# Altium PCB dev_26_pcb_design_1.PcbDoc
Units mil, origin at the board's own origin, x right, y up, seen from the top; angles counter-clockwise.
Board outline 4275 x 2380 mil, 4 copper layers (Top Layer, GND, 3V3, Bottom Layer 1), stack 23.756 mil thick; 68 components, 82 nets, 288 pads, 92 vias.
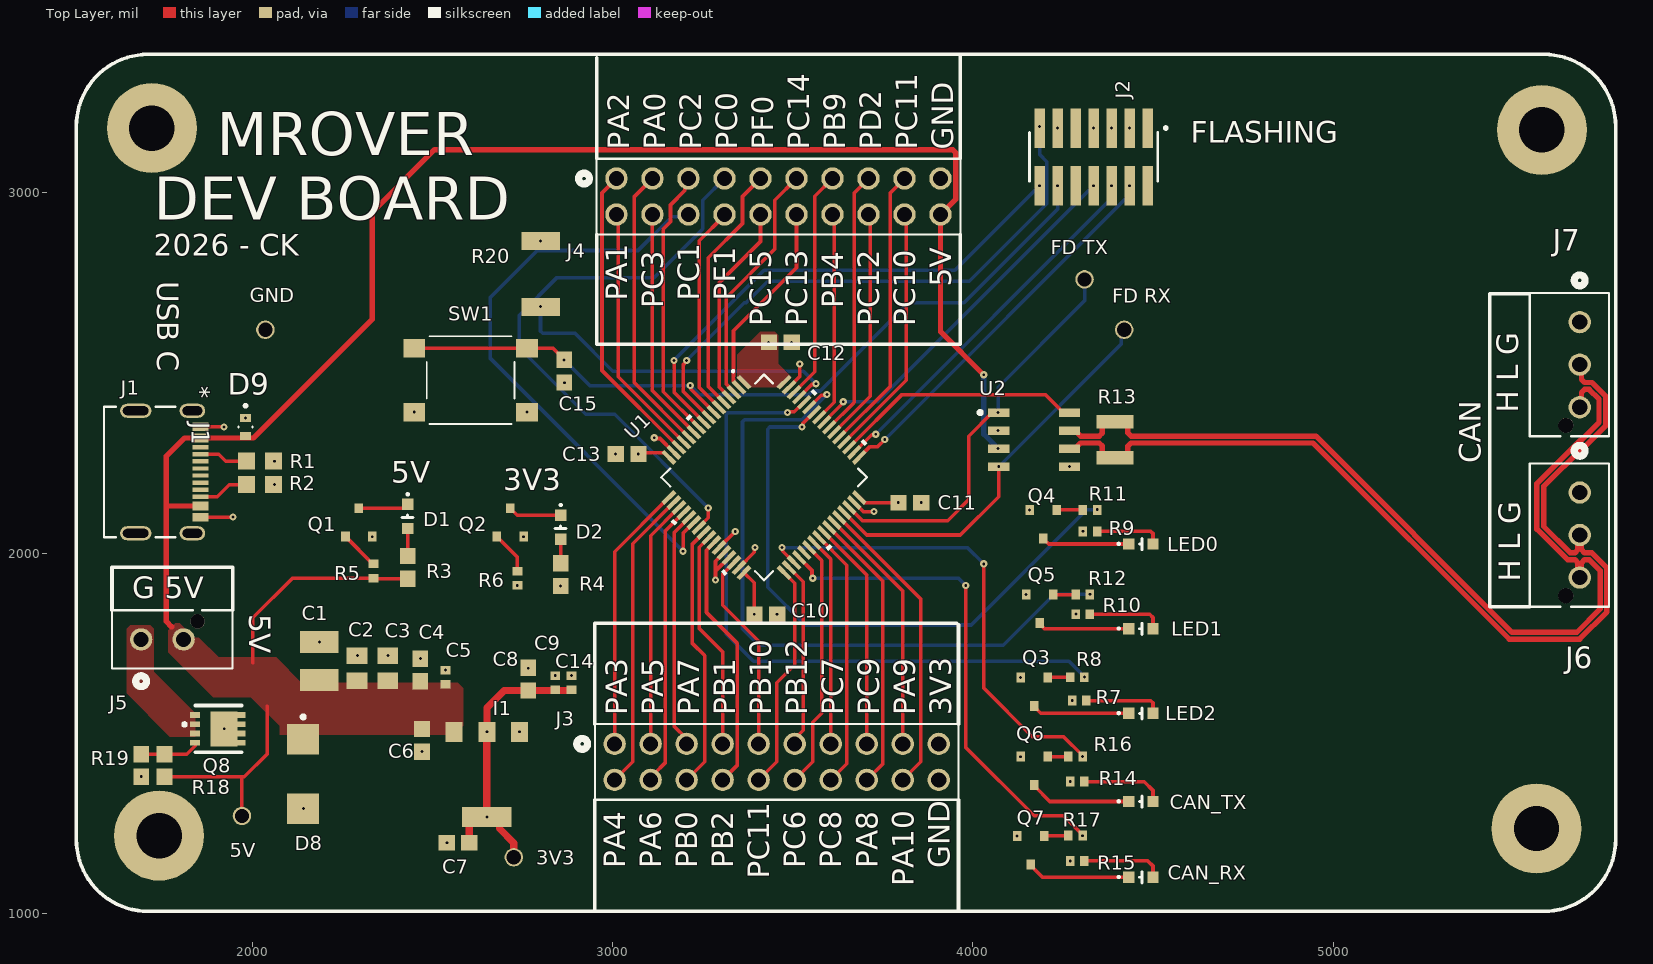
[diagram p0: Top Layer view]
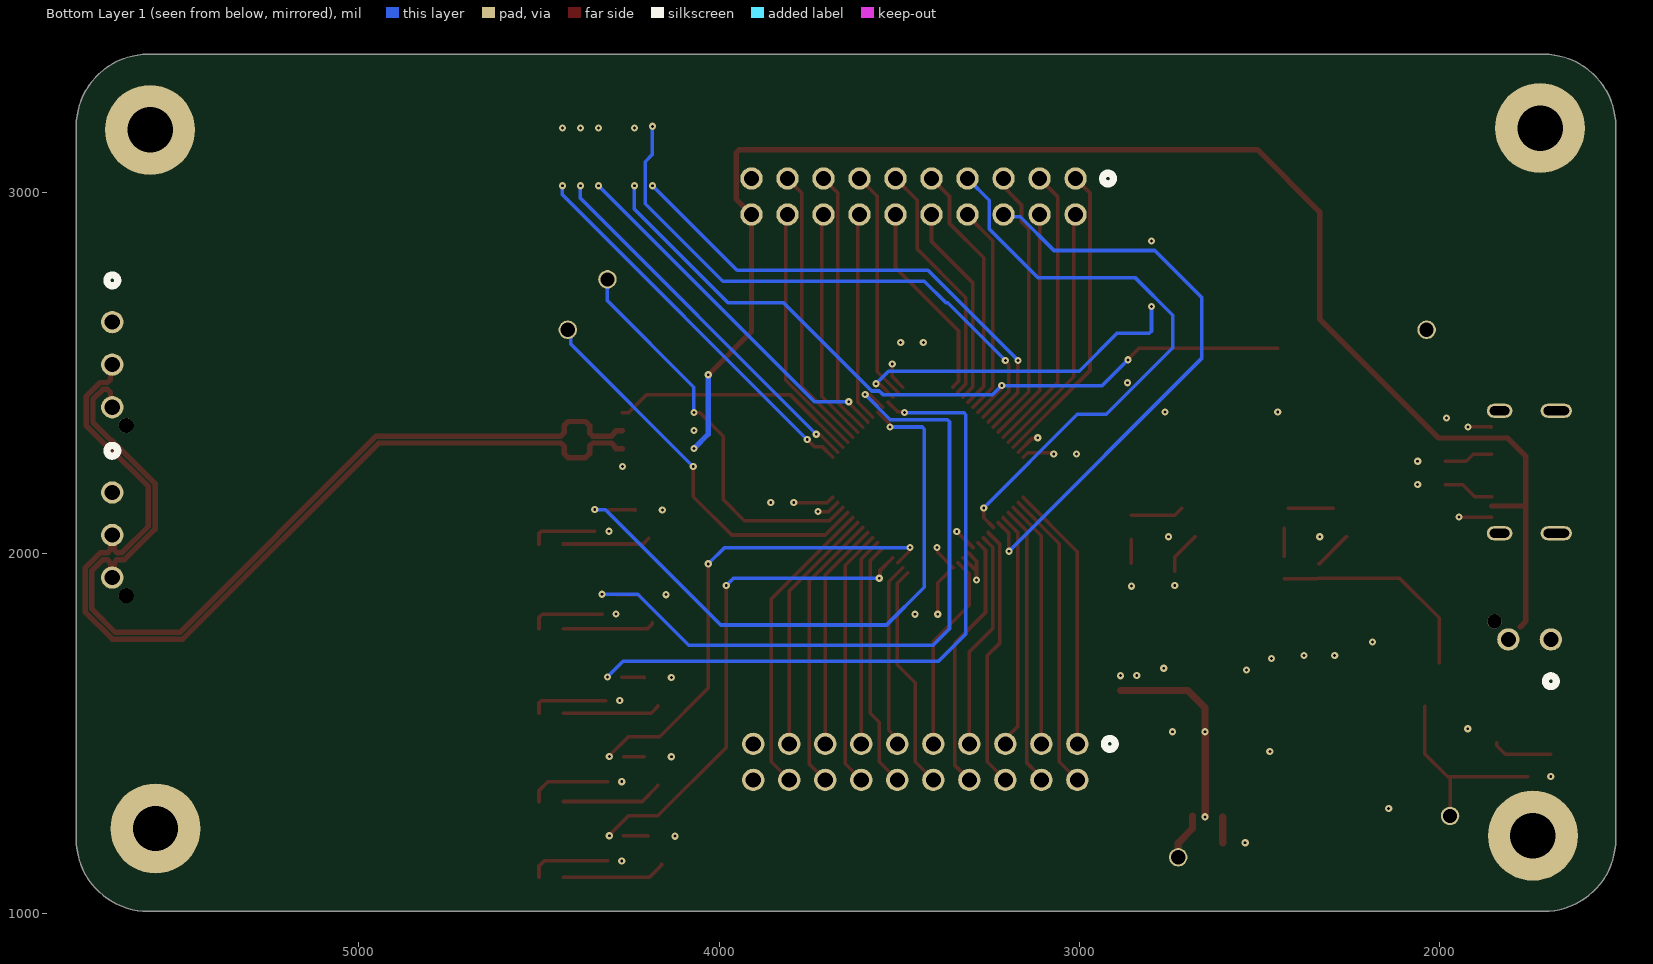
[diagram p1: Bottom Layer 1 view, seen from below]
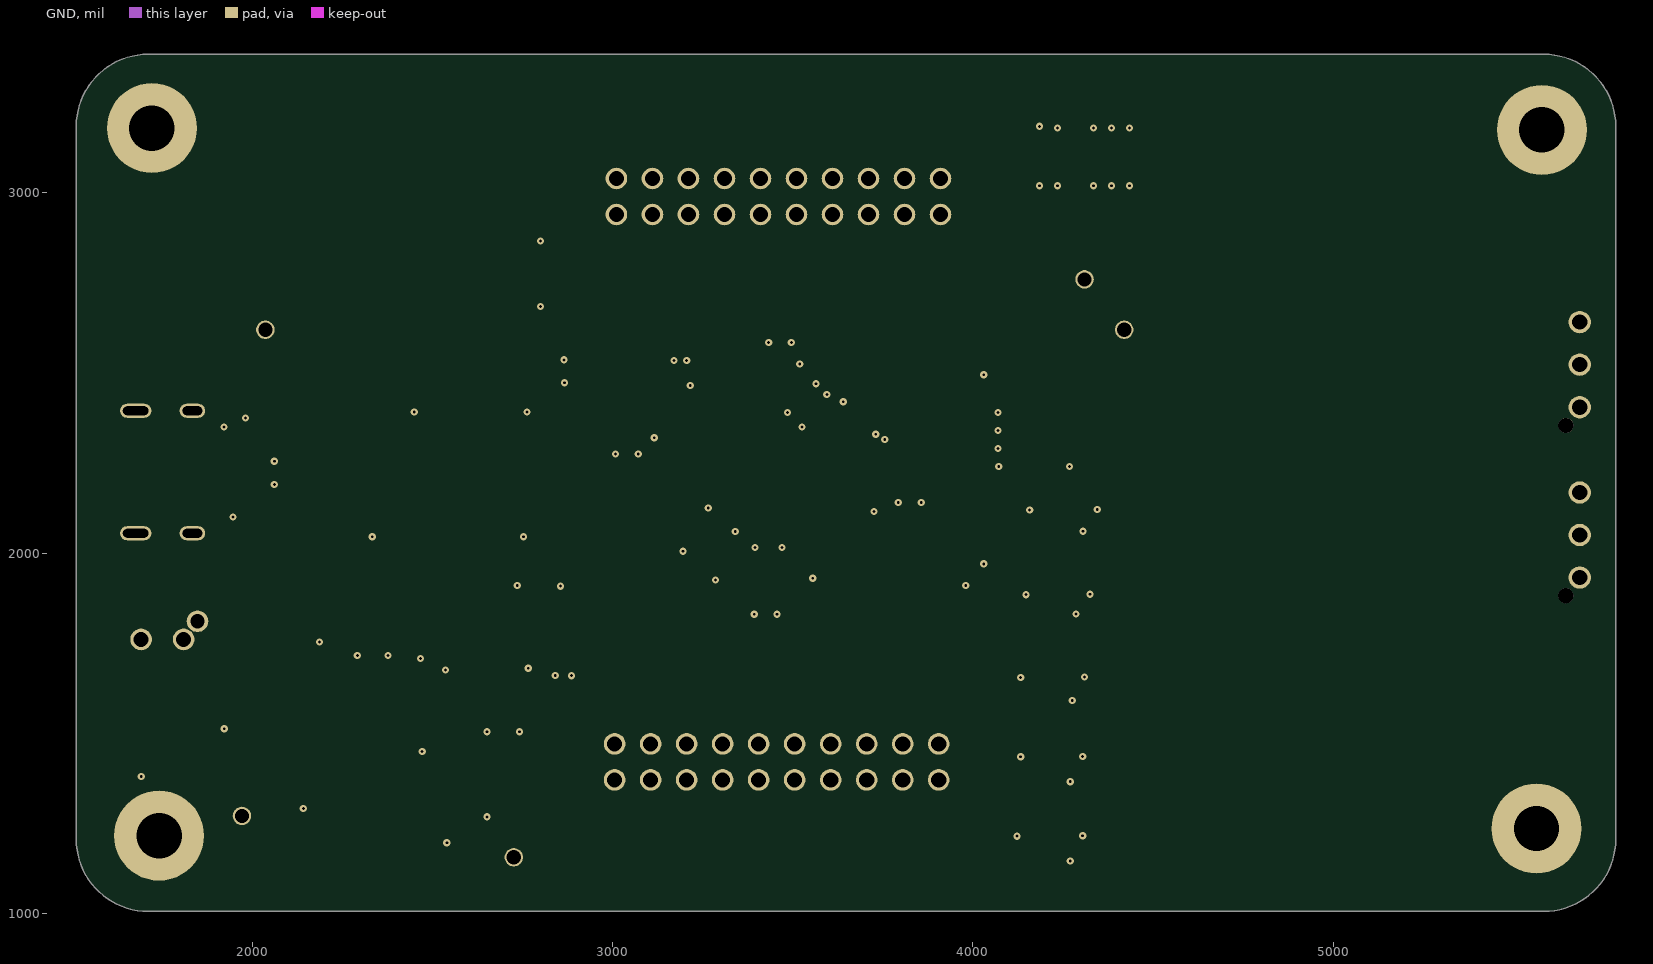
[diagram p2: GND]
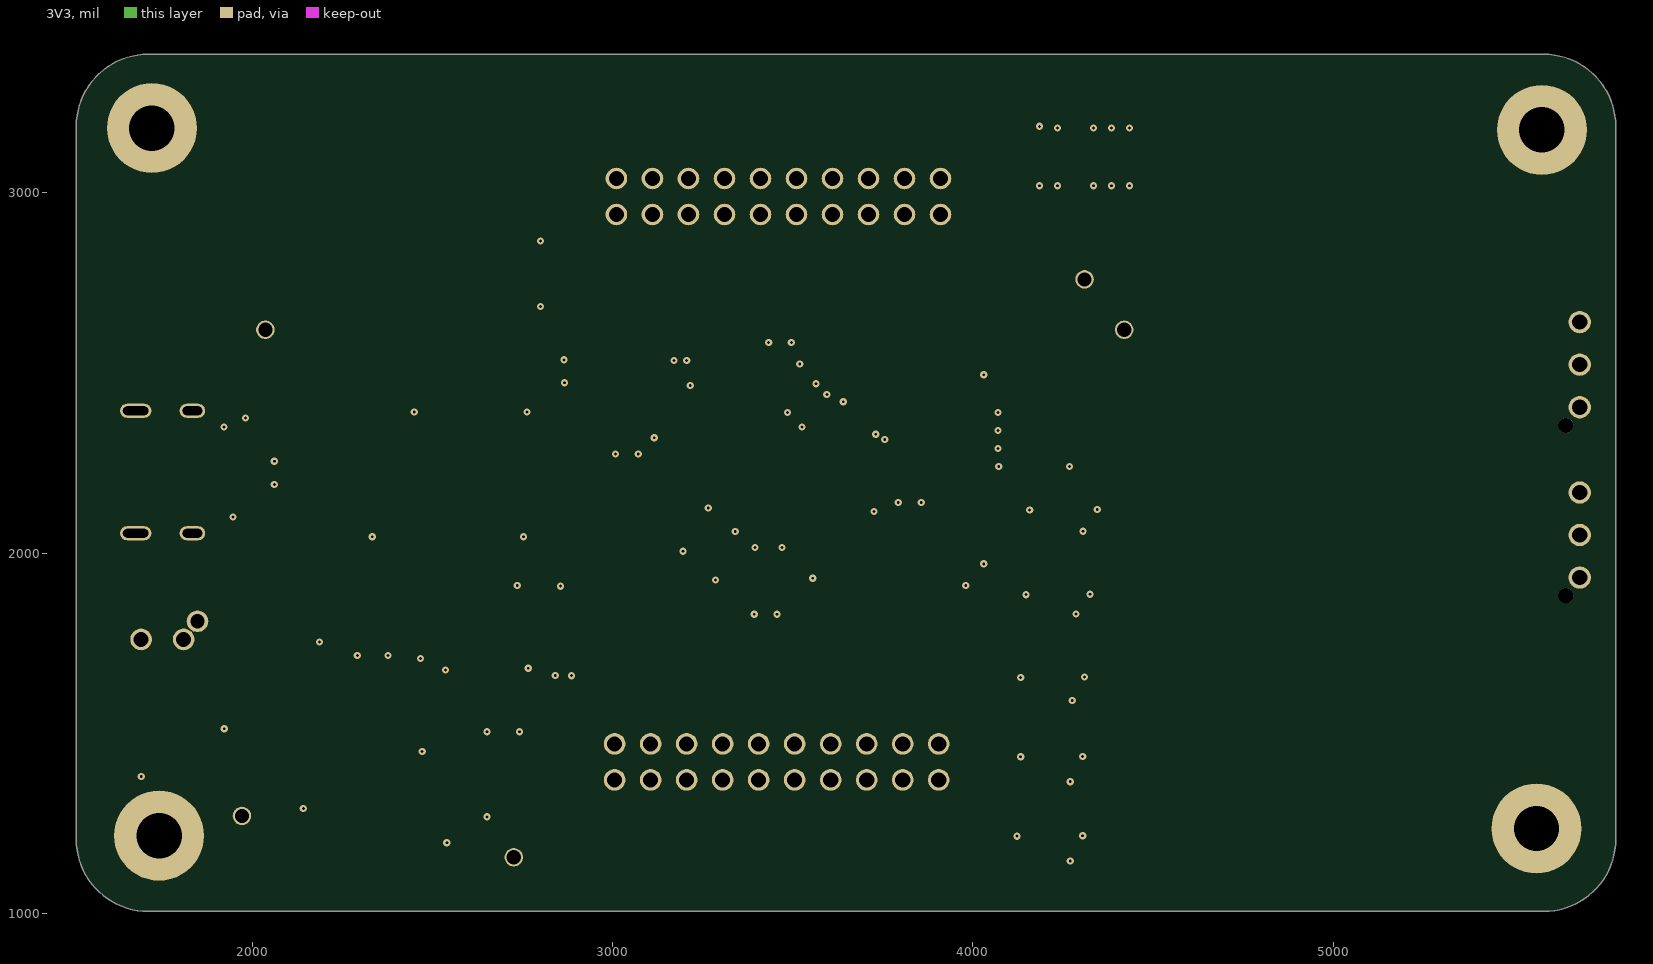
[diagram p3: 3V3]

## Layer stack, top to bottom
Top Solder: solder mask 0.4, Solder Resist, Dk 3.5
Top Layer: signal copper 1.378
Dielectric 2: prepreg 2.8, PP-006, Dk 4.1
GND: signal copper 1.4
Dielectric 1: dielectric 12.6, FR-4, Dk 4.8
3V3: signal copper 1.4
Dielectric 3: prepreg 2.8, PP-006, Dk 4.1
Bottom Layer 1: signal copper 1.378
Bottom Solder: solder mask 0.4, Solder Resist, Dk 3.5

## Board outline
1510,1205 1510,3185 cw(c1710,3185) 1710,3385 5585,3385 cw(c5585,3185) 5785,3185 5785,1205 cw(c5585,1205) 5585,1005 1710,1005 cw(c1710,1205)

## Design rules (kind name [scope] priority, off if disabled: settings)
BoardOutlineClearance [All] p1: gap=7.87 ignorepadtopadclearanceinfootprint=FALSE
Clearance [All] p1: gap=4 ignorepadtopadclearanceinfootprint=FALSE except(5: Arc-Via Track-Via SMDPad-Via THPad-Via Via-Via Via-Fill Via-Poly Via-Region Via-Text; 9.84: Arc-Hole Track-Hole SMDPad-Hole THPad-Hole Via-Hole Fill-Hole Poly-Hole Region-Hole Text-Hole)
ComponentClearance [All] p1: gap=4 collisioncheckmode=3 verticalgap=4 showdistances=TRUE
DiffPairsRouting [All] p1: maxlimit=4 minlimit=4 mostfreqgap=4 toplayer_minwidth=4 toplayer_maxwidth=71497.94 toplayer_prefwidth=4 midlayer1_minwidth=4 midlayer1_maxwidth=71497.94 midlayer1_prefwidth=4 midlayer2_minwidth=4 midlayer2_maxwidth=71497.94 midlayer2_prefwidth=4 bottomlayer_minwidth=4 bottomlayer_maxwidth=71497.94 bottomlayer_prefwidth=4 maxuncoupledlength=500
Height [All] p1: minheight=0 maxheight=71497.94 prefheight=500
HoleSize [All] p1: absolutevalues=TRUE maxlimit=248.03 minlimit=7.87 maxpercent=80.000 minpercent=20.000
HoleToHoleClearance [All] p1: gap=9.84 allowstackedmicrovias=FALSE
MinimumAnnularRing [All] p1: minimumring=3
MinimumSolderMaskSliver [All] p1: minsoldermaskwidth=0
PlaneClearance [All] p1: clearance=4
PlaneConnect PlaneConnectPowerPads [InPadClass('PowerPads')] p1: planeconnectstyle=Direct reliefexpansion=20 reliefentries=4 reliefconductorwidth=10 reliefairgap=10
PlaneConnect [All] p2: pad.planeconnectstyle=Relief pad.reliefexpansion=11.81 pad.reliefentries=4 pad.reliefconductorwidth=4 pad.reliefairgap=4 via.planeconnectstyle=Direct via.reliefexpansion=11.81 via.reliefentries=4 via.reliefconductorwidth=5 via.reliefairgap=5
PolygonConnect PolygonConnectPowerPads [All vs (InPadClass('PowerPads'))] p1: connectstyle=Direct reliefconductorwidth=10 reliefentries=4 polygonreliefangle="90 Angle" airgapwidth=10
PolygonConnect [All] p2: connectstyle=Direct reliefconductorwidth=4 reliefentries=4 polygonreliefangle="90 Angle" airgapwidth=4
RoutingVias [All] p1: holewidth=7.87 width=17.72 viastyle="Through Hole" minholewidth=7.87 minwidth=17.72 maxholewidth=248.03 maxwidth=257.87
SilkToSilkClearance [All] p1: silktosilkclearance=0
SilkToSolderMaskClearance [IsPad] p1: minsilkscreentomaskgap=4 clearancetoexposedcopper=TRUE
SolderMaskExpansion [All] p1: expansion=2.95 istentingtop=FALSE
SupplyNets "Schematic Supply Nets_2" [InNet('3V3')] p1: voltage=0.000
SupplyNets "Schematic Supply Nets_1" [InNet('GND')] p2: voltage=0.000
SupplyNets "Schematic Supply Nets" [InNet('5V')] p3: voltage=0.000
Width [All] p1: maxlimit=71497.94 minlimit=4 preferedwidth=4
20 further rules are at their usual default settings.

## Classes and differential pairs
component class MCU: * C8 C9 C10 C11 C12 C13 C14 C15 D3 D4 D5 J2 J3 J4 Q3 Q4 Q5 R7 R8 R9 R10 R11 R12 R20 SW1 U1
component class Input_Power: * C1 C2 C3 C4 C5 C6 C7 D1 D2 D8 D9 I1 J1 J5 Q1 Q2 Q8 R1 R2 R3 R4 R5 R6 R18 R19 TP1 TP2 TP3
component class CAN: * D6 D7 J6 J7 Q6 Q7 R13 R14 R15 R16 R17 TP4 TP5 U2
differential pair CAN: +CAN_H -CAN_L

## Components (designator, comment, footprint, x,y, rotation, side; value= is the part's Value field where it differs from the comment)
3V3 "5003" TEST-POINT-0001 2725,1155 r0 top (schematic designator TP2)
5V "5003" TEST-POINT-0001 1970,1270 r0 top (schematic designator TP1)
C1 "CL32B106KBJNNNE" CAP-1210 2185,1700 r270 top
C2 "CC0805KKX7R9BB105" CAP-0805 2290,1680 r270 top
C3 "CC0805KRX7R9BB104" CAP-0805 2375,1680 r270 top
C4 "CC0603KPX7R9BB103" CAP-0603 2465,1675 r270 top
C5 "CC0402KRX7R9BB102" CAP-0402 2535,1655 r270 top
C6 "GRM188R61A106ME69D" CAP-0603 2470,1480 r270 top
C7 "GRM188R61A106ME69D" CAP-0603 2570,1195 r180 top
C8 "CC0603ZRY5V9BB104" CAP-0603 2765,1650 r90 top
C9 "GRM155R61A475MEAAD" CAP-0402 2840,1640 r90 top
C10 "CC0603ZRY5V9BB104" CAP-0603 3425,1830 r0 top
C11 "CC0603ZRY5V9BB104" CAP-0603 3825,2140 r0 top
C12 "CC0603ZRY5V9BB104" CAP-0603 3465,2585 r0 top
C13 "CC0603ZRY5V9BB104" CAP-0603 3040,2275 r180 top
C14 "GRM155R61A475MEAAD" CAP-0402 2885,1640 r90 top
C15 "CC0603ZRY5V9BB104" CAP-0603 2865,2505 r270 top
CAN_RX "BL-HKC36G-AV-TRB" LED-0603 4409.81,1070.42 r0 top (schematic designator D7)
CAN_TX "BL-HKC36G-AV-TRB" LED-0603 4409.81,1280.42 r0 top (schematic designator D6)
D1 "BL-HKC36G-AV-TRB" LED-0603 2400.43,2158.2 r270 top
D2 "BL-HKC36G-AV-TRB" LED-0603 2825.43,2128.2 r270 top
D8 "SMBJ40CA" "DO-214AA (SMBJ)" 2140,1385 r90 top
D9 "ESDA7P60-1U1M" TVS_ESDA7P60-1U1M 1980,2350 r270 top
"FD RX" "5003" TEST-POINT-0001 4420,2620 r0 top (schematic designator TP5)
"FD TX" "5003" TEST-POINT-0001 4310,2760 r0 top (schematic designator TP4)
GND "5003" TEST-POINT-0001 2035,2620 r0 top (schematic designator TP3)
I1 "LM1117IMPX-3.3/NOPB" IC-SOT-223-4 2650,1385 r270 top
J1 "2171790001" 2171790001_MOL 1725,2225 r270 top
J2 "FTSH-107-01-L-DV-K" SAMTEC_FTSH-107-01-L-DV-K 4335,3100.12 r180 top
J3 "10897201" CONN20_0010897201_MOL 3005,1470 r0 top
J4 "10897201" CONN20_0010897201_MOL 3010,3040 r0 top
J5 "2068320201" CONN_2068320000-SD_02_MOL 1690,1760 r270 top
J6 "2165712003" CONN_2165710003-SD_03_MOL 5685,2168.11 r90 top
J7 "2165712003" CONN_2165710003-SD_03_MOL 5685,2641.22 r90 top
LED0 "BL-HKC36G-AV-TRB" LED-0603 4409.81,1995.42 r0 top (schematic designator D4)
LED1 "BL-HKC36G-AV-TRB" LED-0603 4409.81,1760.42 r0 top (schematic designator D5)
LED2 "BL-HKC36G-AV-TRB" LED-0603 4409.81,1525.42 r0 top (schematic designator D3)
Q1 "T2N7002AK,LM" IC-SOT23-3 2295,2085 r0 top
Q2 "T2N7002AK,LM" IC-SOT23-3 2715,2085 r0 top
Q3 "T2N7002AK,LM" IC-SOT23-3 4170,1615 r180 top
Q4 "T2N7002AK,LM" IC-SOT23-3 4195,2080 r180 top
Q5 "T2N7002AK,LM" IC-SOT23-3 4185,1845 r180 top
Q6 "T2N7002AK,LM" IC-SOT23-3 4170,1395 r180 top
Q7 "T2N7002AK,LM" IC-SOT23-3 4160,1174.37 r180 top
Q8 "CSD18543Q3AT" IC-8VSONCLIP 1805.47,1583.93 r270 top
R1 "RC0805JR-075K1L" RES-0805 2020,2255 r0 top
R2 "RC0805JR-075K1L" RES-0805 2020,2190 r0 top
R3 "RC0603FR-072KL" RES-0603 2430,1960 r90 top
R4 "RT0603FRE131KL" RES-0603 2855,1940 r90 top
R5 "RC0402FR-07470RL" RES-0402 2335,1950 r90 top
R6 "RC0402FR-07470RL" RES-0402 2735,1930 r90 top
R7 "RC0402FR-07100RL" RES-0402 4295,1590 r0 top
R8 "RC0402FR-07470RL" RES-0402 4290,1655 r180 top
R9 "RC0402FR-07100RL" RES-0402 4325,2060 r0 top
R10 "RC0402FR-07100RL" RES-0402 4305,1830 r0 top
R11 "RC0402FR-07470RL" RES-0402 4325,2120 r180 top
R12 "RC0402FR-07470RL" RES-0402 4305,1885 r180 top
R13 "RC1210FR-07120RL" RES-1210 4395,2315 r90 top
R14 "RC0402FR-07100RL" RES-0402 4290,1365 r0 top
R15 "RC0402FR-07100RL" RES-0402 4290,1145 r0 top
R16 "RC0402FR-07470RL" RES-0402 4285,1435 r180 top
R17 "RC0402FR-07470RL" RES-0402 4285,1215 r180 top
R18 "RES 0603" RES-0603 1755,1410 r270 top
R19 "RES 0603" RES-0603 1690,1410 r90 top
R20 "CRF2010-J/-000ELF" RES-2010 2800,2775 r270 top
SW1 "430182095816" 430182095816 2605,2480 r0 top
U1 "STM32G431RBT6" LQFP64-10x10mm 3420,2210 r315 top
U2 "TCAN1044VDRQ1" IC-8SOIC 4170,2315 r270 top

## Footprints (in the part's own frame and the unit in brackets; to place one, negate y for a bottom-side part, rotate by r counter-clockwise, add the part's x,y. Pads: shape width x height; smd on the part's side, far side on the other; paste and mask are expansions set on the pad)
2171790001_MOL [mil]
  oval 39x87 hole 71 slot 24 at 0 deg paste-99999 mask-43.5: 13(-170.08,-50.07) 14(170.08,-50.07)
  oval 39x71 hole 55 slot 24 at 0 deg paste-99999 mask-35.5: 15(-170.08,107.41) 16(170.08,107.41)
  rect 24x45 smd paste+0 mask+0: A1/B12(-125.98,130.05) A4/B9(-94.49,130.05) B1/A12(125.98,130.05) B4/A9(94.49,130.05)
  rect 12x45 smd paste+0 mask+0: A5(-49.21,130.05) A6(-9.84,130.05) A7(9.84,130.05) A8(49.21,130.05) B5(68.9,130.05) B6(29.53,130.05) B7(-29.53,130.05) B8(-68.9,130.05)
  silkscreen extent -181,-138 181,61
430182095816 [mm] "SMD Tact Switch, body 6x6mm"
  rect 1.55x1.3 smd: A1(-3.975,2.25) A2(3.975,2.25) B1(-3.975,-2.25) B2(3.975,-2.25)
  silkscreen extent -3.1,-3.1 3.1,3.1, body extent -4.5,-3.1 4.5,3.1, height 9.5
CAP-0402 [mm]
  rect 0.6x0.7 smd: 1(-0.5,0) 2(0.5,0)
  body extent -0.5,-0.22 0.5,0.23, height 0.5
CAP-0603 [mm]
  rect 1.15x1.1 smd: 1(-0.8,0) 2(0.8,0)
  body extent -0.8,-0.45 0.8,0.45, height 0.8
CAP-0805 [mm]
  rect 1.16x1.47 smd: 1(-0.88,0) 2(0.88,0)
  body extent -1,-0.63 1,0.63, height 0.94
CAP-1210 [mm]
  rect 1.53x2.72 smd: 1(-1.341,0) 2(1.341,0)
  body extent -1.6,-1.25 1.6,1.25, height 2.7
CONN20_0010897201_MOL [mil]
  round 62 / inner round 60 / far side round 62 hole 42 paste-99999 mask+0: 1(0,0) 2(0,-100) 3(100,0) 4(100,-100) 5(200,0) 6(200,-100) 7(300,0) 8(300,-100) 9(400,0) 10(400,-100) 11(500,0) 12(500,-100) 13(600,0) 14(600,-100) 15(700,0) 16(700,-100) 17(800,0) 18(800,-100) 19(900,0) 20(900,-100)
  silkscreen extent -105,-155 955,55, body extent -51,-147 949,53, height 329
CONN_2068320000-SD_02_MOL [mil]
  round 62 / inner round 60 / far side round 62 hole 42 paste-99999 mask+0: 1(0,0) 2(0,118.11)
  round 40 / inner round 60 / far side round 40 hole 40 unplated paste-99999 mask+0: 3(-50.39,156.69)
  silkscreen extent -81,-81 131,254, body extent -76,-76 76,249, height 392
CONN_2165710003-SD_03_MOL [mil]
  round 62 hole 42 paste-99999 mask+0: 1(0,0) 2(-118.11,0) 3(-236.22,0)
  round 42 hole 42 unplated paste-99999 mask+0: 4(-286.61,38.58)
  silkscreen extent -317,-81 131,139, body extent -312,-75 76,135, height 394
"DO-214AA (SMBJ)" [mm]
  rect 2.16x2.26 smd: 1(-2.416,0) 2(2.484,0)
  silkscreen extent 3.94,-0.13 4.19,0.12, body extent -2.72,-1.95 2.78,1.95, height 2.45
IC-8SOIC [mm]
  rect 0.6x1.5 smd: 1(-1.905,-2.5) 2(-0.635,-2.5) 3(0.635,-2.5) 4(1.905,-2.5) 5(1.905,2.5) 6(0.635,2.5) 7(-0.635,2.5) 8(-1.905,2.5)
  silkscreen extent -2.03,-3.93 -1.78,-3.68, body extent -2.45,-3 2.45,3, height 1.75
IC-8VSONCLIP [mm]
  rect 0.4x0.7 smd paste-100 mask+0.05: 1(2.812,0.877) 2(0.862,0.877) 2(1.512,0.877) 2(2.162,0.877) 3(0.862,4.077) 3(1.512,4.077) 3(2.162,4.077) 3(2.812,4.077)
  rect 2.45x1.9 smd paste-100 mask+0.05: 3(1.837,2.917)
  silkscreen extent 0.19,0.03 3.49,4.18, body extent 0.18,0.89 3.48,4.19, height 1.1
IC-SOT23-3 [mm]
  rect 0.6x0.7 smd: 1(-0.95,-1) 2(0.95,-1) 3(0,1)
  body extent -1.46,-1.18 1.46,1.19, height 1.12
IC-SOT-223-4 [mm]
  rect 1.4x1.2 smd mask+0.07: 1(-3,2.3) 3(-3,-2.3) 4(-3,0)
  rect 1.4x3.5 smd: 2(3,0)
  body extent -3.5,-3.25 3.5,3.25, height 1.68
LED-0603 [mm]
  rect 0.8x0.8 smd: 1(2.291,0.751) 2(0.589,0.751)
  silkscreen extent -0.2,0.34 1.52,1.13, body extent 0.65,0.36 2.25,1.16, height 0.39
LQFP64-10x10mm [mil]
  rect 47x12 smd paste+0 mask+0: 1(-226.38,147.64) 2(-226.38,127.95) 3(-226.38,108.27) 4(-226.38,88.58) 5(-226.38,68.9) 6(-226.38,49.21) 7(-226.38,29.53) 8(-226.38,9.84) 9(-226.38,-9.84) 10(-226.38,-29.53) 11(-226.38,-49.21) 12(-226.38,-68.9) 13(-226.38,-88.58) 14(-226.38,-108.27) 15(-226.38,-127.95) 16(-226.38,-147.64) 33(226.38,-147.64) 34(226.38,-127.95) 35(226.38,-108.27) 36(226.38,-88.58) 37(226.38,-68.9) 38(226.38,-49.21) 39(226.38,-29.53) 40(226.38,-9.84) 41(226.38,9.84) 42(226.38,29.53) 43(226.38,49.21) 44(226.38,68.9) 45(226.38,88.58) 46(226.38,108.27) 47(226.38,127.95) 48(226.38,147.64)
  rect 12x47 smd paste+0 mask+0: 17(-147.64,-226.38) 18(-127.95,-226.38) 19(-108.27,-226.38) 20(-88.58,-226.38) 21(-68.9,-226.38) 22(-49.21,-226.38) 23(-29.53,-226.38) 24(-9.84,-226.38) 25(9.84,-226.38) 26(29.53,-226.38) 27(49.21,-226.38) 28(68.9,-226.38) 29(88.58,-226.38) 30(108.27,-226.38) 31(127.95,-226.38) 32(147.64,-226.38) 49(147.64,226.38) 50(127.95,226.38) 51(108.27,226.38) 52(88.58,226.38) 53(68.9,226.38) 54(49.21,226.38) 55(29.53,226.38) 56(9.84,226.38) 57(-9.84,226.38) 58(-29.53,226.38) 59(-49.21,226.38) 60(-68.9,226.38) 61(-88.58,226.38) 62(-108.27,226.38) 63(-127.95,226.38) 64(-147.64,226.38)
  silkscreen extent -273,-270 270,270, body extent -236,-236 236,236, height 63
RES-0402 [mm]
  rect 0.6x0.7 smd: 1(-0.5,0) 2(0.5,0)
  body extent -0.5,-0.25 0.5,0.25, height 0.3
RES-0603 [mm]
  rect 1.15x1.1 smd: 1(-0.8,0) 2(0.8,0)
  body extent -0.8,-0.4 0.8,0.4, height 0.43
RES-0805 [mm]
  rect 1.2x1.2 smd: 1(-0.95,0) 2(0.95,0)
  body extent -1,-0.6 1,0.6, height 0.71
RES-1210 [mm] "Chip Resistor, 2-Leads, Body 3.10x2.60mm, IPC High Density"
  rect 0.95x2.6 smd: 1(-1.275,0) 2(1.275,0)
  body extent -1.6,-1.35 1.6,1.35, height 0.6
RES-2010 [mm]
  rect 1.26x2.72 smd: 1(-2.325,0) 2(2.325,0)
  body extent -2.5,-1.25 2.5,1.25, height 0.7
SAMTEC_FTSH-107-01-L-DV-K [mm]
  rect 0.74x2.79 smd: 01(-3.81,-2.035) 02(-3.81,2.035) 03(-2.54,-2.035) 04(-2.54,2.035) 05(-1.27,-2.035) 06(-1.27,2.035) 07(0,-2.035) 08(0,2.035) 09(1.27,-2.035) 10(1.27,2.035) 11(2.54,-2.035) 12(2.54,2.035) 13(3.81,-2.035) 14(3.81,2.035)
  silkscreen extent -5.2,-2.13 4.53,1.72, body extent -4.45,-2.82 4.44,3.02, height 5.96
TEST-POINT-0001 [mm] "2024 miniature test point"
  round 1.3 hole 1: 1(0,0)
  body extent -1.27,-1.27 1.27,1.27, height 4.57
TVS_ESDA7P60-1U1M [mm]
  rect 0.55x0.8 smd: 1(-0.625,0) 2(0.625,0)
  silkscreen extent -1.6,-0.5 0.03,0.5, body extent -0.8,-0.53 0.8,0.47, height 0.6

## Part data
3V3 5V "FD RX" "FD TX" GND: library part TEST-POINT-0001, "Oranange PC Test Point, Miniature Phoisphor Bronze Silver Plating Through Hole Mounting Type"
C1: library part "CAP 1210", Capacitance="10 uF", Voltage Rating="50 V"
C2: library part "CAP 0805", Capacitance="1 uF", Voltage Rating=50V
C3: library part "CAP 0805", Capacitance="100 nF", Voltage Rating=50V
C4: library part "CAP 0603", Capacitance="10 nF", Voltage Rating=50V
C5: library part "CAP 0402", Capacitance="1 nF", Voltage Rating=50V
C6 C7: library part "CAP 0603", Capacitance="10 uF", Voltage Rating="10 V"
C8 C10 C11 C12 C13 C15: library part "CAP 0603", Capacitance="100 nF", Voltage Rating=50V
C9 C14: library part "CAP 0402", Capacitance="4.7 uF", Voltage Rating=10V
CAN_RX CAN_TX D1 D2 LED0 LED1 LED2: library part LED-0001, "LED YELLOW CLEAR 0603 SMD", Forward Current=30mA, Forward Voltage=2V, ComponentLink1Description=Datasheet, ComponentLink1URL=https://www.americanbrightled.com/pdffiles/led-components/smt/BL-HKC36G-AV-TRB.pdf
D8: library part DIO-TVS-0001, "TVS DIODE 40VWM 64.5VC DO214AA", Current Rating=9.3A, Voltage Rating=64.5V, ComponentLink1Description=Datasheet, ComponentLink1URL=https://www.littelfuse.com/media?resourcetype=datasheets&itemid=09a6ae9a-73cb-4ac4-acac-e6dab92ab953&filename=littelfuse_tvs_diode_smbj_datasheet.pdf
D9: library part DIO-TVS-11V, "TVS DIODE 5VWM 11.6VC 1610", Package=None, Voltage=11.6V, Availability=Unavailable, ComponentLink1Description=Datasheet, ComponentLink1URL=https://www.st.com/resource/en/datasheet/esda20p50-1u1m.pdf, MF="{'manufacturer': u'STMicroelectronics'}", MP=ESDA7P60-1U1M, Price=None
I1: library part IC_LDO_3V3_0001, "IC REG LIN 3.3V 800MA SOT223-4", ComponentLink1Description="New link", ComponentLink1URL=https://www.ti.com/lit/ds/symlink/lm1117.pdf?HQS=dis-dk-null-digikeymode-dsf-pf-null-wwe&ts=1721700739746
J1: "Universal Serial Bus (USB) Shielded I/O Receptacle, Type C, Right-Angle, Top Mount, Surface Mount, Single Row, 16 Circuits, Gold (Au) Plating", Manufacturer_Name="Molex Connector Corporation", Copyright="Copyright (C) 2025 Ultra Librarian. All rights reserved.", Manufacturer_Part_Number=2171790001, RefDes=RefDes, Type=Type
J2: library part CONN_Flashing-0001, "Connector Header Surface Mount 14 position 0.050\" (1.27mm)", Package=None, Availability=Unavailable, ComponentLink1Description=Datasheet, ComponentLink1URL=https://mm.digikey.com/Volume0/opasdata/d220001/medias/docus/6209/ftsh-1xx-xx-xxx-dv-xxx-xxx-x-xx-mkt.pdf, MF=Samtec, MP=FTSH-107-01-L-DV-K, Price=None
J3 J4: library part CONN-20, "2.54mm Pitch C-Grid Breakaway Header, Dual Row, Vertical, High Temperature, 20 Circuits, Tin (Sn) Plating, 2.72mm PC Tail Length", Manufacturer_Name="Molex Connector Corporation", Copyright="Copyright (C) 2025 Ultra Librarian. All rights reserved.", Datasheet=https://www.molex.com/en-us/products/part-detail-pdf/10897201?display=pdf, Manufacturer_Part_Number=10897201, RefDes=RefDes, Type=Type
J5: library part "CONN MF+ 2 PIN VERT", "Micro-Fit+ Vertical Header, Through Hole, 3.00mm Pitch, Dual Row, 2 Circuits, Tin (Sn) Plating, Glow-Wire Capable, Black, Tray", Manufacturer_Name="Molex Connector Corporation", Copyright="Copyright (C) 2025 Ultra Librarian. All rights reserved.", Manufacturer_Part_Number=2068320201, RefDes=RefDes, Type=Type
J6 J7: library part "CONN MF+ 3 PIN VERT", "Micro-Fit+ Vertical Header, Through Hole, 3.00mm Pitch, Single Row, 3 Circuits, 0.38Âµm Gold (Au) Plating, Glow-Wire Capable, Black", Manufacturer_Name="Molex Connector Corporation", Copyright="Copyright (C) 2026 Ultra Librarian. All rights reserved.", Manufacturer_Part_Number=2165712003, RefDes=RefDes, Type=Type
Q1 Q2 Q3 Q4 Q5 Q6 Q7: library part NMOS-200MA-0001, "MOSFET N-CH 60V 200MA SOT23", Continuous Current=200mA, Voltage=60V, ComponentLink1Description=Datasheet, ComponentLink1URL=https://toshiba.semicon-storage.com/info/T2N7002AK_datasheet_en_20150401.pdf?did=29712&prodName=T2N7002AK
Q8: library part NMOS-60A-0001, "MOSFET N-CH 60V 12A/60A 8VSON", Continuous Current=60A, Voltage=60V, ComponentLink2Description=Datasheet, ComponentLink2URL=http://www.ti.com/lit/ds/symlink/csd18543q3a.pdf
R1 R2: library part "RES 0805", Resistance="5.1k Ω", Wattage="1/8 W"
R3: library part "RES 0603", Resistance="2k Ω", Wattage="1/10 W"
R4: library part "RES 0603", Resistance="1k Ω", Wattage="1/10 W"
R5 R6 R8 R11 R12 R16 R17: library part "RES 0402", Resistance="470 Ω", Wattage="1/16 W"
R7 R9 R10 R14 R15: library part "RES 0402", Resistance="100 Ω", Wattage="1/16 W"
R13: library part "RES CAN TERM 1210", Resistance=120Ω, Wattage="1/2 W"
R18: Resistance=200kΩ, Wattage=100mW
R19: Resistance=100kΩ, Wattage=100mW
R20: library part RES-0-0001, "0 Ohms Jumper Chip Resistor 2010 (5025 Metric) Automotive AEC-Q200 Metal Element", Resistance=0Ω, Tolerance=1%, ComponentLink1Description=Datasheet, ComponentLink1URL=https://www.yageo.com/upload/media/product/products/datasheet/rchip/PYu-RC_Group_51_RoHS_L_12.pdf, Size=0402
SW1: library part BUTTON-VERT-12V-0.5A, "WS-TASV SMT Tact Switch, 6mm x 6mm, 160gf, SPST-NO, 12V, 50mA", Manufacturer="Wurth Elektronik", Max Operating Temperature=85°C, Min Operating Temperature=-40°C, Rated Current=50mA, Rated Voltage (DC)=12V, Category="Tact Switch", Circuit=SPST-NO, ComponentLink1Description="Website Link", ComponentLink1URL=https://www.we-online.com/redexpert/article/430182095816?ad, ComponentLink2Description="Datasheet Link", ComponentLink2URL=https://www.we-online.com/redexpert/spec/430182095816?ad, Contact Material="Stainless Steel", Contact Plating=Silver, Height=9.5mm, Length=6mm, Manufacturer Part Number=430182095816, Match Code=WS-TASV, Mount="Surface Mount", Operation Force=160gf, Packaging="Tape and Reel", Terminal Material="Copper Alloy", Terminal Plating=Silver, Washable=No, Width=6mm
U1: library part IC-STM32G431RBT6, "Mainstream Arm Cortex-M4 MCU 170 MHz with 128 Kbytes of Flash memory, Math Accelerator, Medium Analog level integration", Manufacturer_Name=STMicroelectronics, Copyright="Copyright (C) 2025 Ultra Librarian. All rights reserved.", Datasheet=https://www.st.com/resource/en/datasheet/stm32g431c6.pdf, Manufacturer_Part_Number=STM32G431RBT6, RefDes=RefDes, Type=Type
U2: library part IC-CAN-0001, "IC TRANSCEIVER 1/1 8SOIC", ComponentLink1Description=Datasheet, ComponentLink1URL=https://www.ti.com/lit/ds/symlink/tcan1044-q1.pdf?HQS=dis-dk-null-digikeymode-dsf-pf-null-wwe&ts=1728758303289&ref_url=https%253A%252F%252Fwww.ti.com%252Fgeneral%252Fdocs%252Fsuppproductinfo.tsp%253FdistId%253D10%2526gotoUrl%253Dhttps%253A%252F%252Fwww.ti.com%252Flit%252Fgpn%252Ftcan1044-q1

## Free pads (board coordinates)
  round 250 hole 126: ""(1720,3180) ""(1740,1215) ""(5565,1235) ""(5580,3175)

## Via types
v1: diameter 20, hole 8, Top Layer to Bottom Layer 1, 92 vias

## Nets (pads, with @x,y where several pads share a name; then routed paths per layer and width w, separated by ;. In a path a pad name is that pad's centre, name@x,y a point inside that pad or via, vN(x,y) a via of type N, cw(c..) or ccw(c..) an arc to the next point about the centre after c; other vN are vias at no path point)
3V3: 3V3.1 C7.1 C8.1 C9.1 C10.1 C11.1 C12.1 C13.1 C14.1 I1.2 I1.4 J2.03 J3.19 R4.1 R6.1 R7.1 R9.1 R10.1 R14.1 R15.1 U1.1 U1.16 U1.28 U1.29 U1.32 U1.48 U1.64 U2.5 | length 1231.7
  Top Layer w10: v1(3070.71,2275) 3073.76,2278.05 3143.16,2278.05 U1.16 ; v1(3285,1925) 3285,1951.28 ; U1.28 3285,1977.56 3285,1951.28 ; U1.29 3286.56,1951.28 3285,1951.28 ; U1.32 3392.72,1917.14 v1(3392.72,1830) ; U1.48 3685.88,2154.32 3700.21,2140 v1(3792.72,2140)
  Top Layer w20: C7.1 I1.2@2601.5,1266.5 ; I1.2 I1.4 ; v1(2650.49,1503.6) 2650.49,1570.49 2698.5,1618.5 C8.1 C14.1@2885,1618.5 ; I1.2@2685,1270 2685,1235 2725,1195 3V3.1
  other v1: 4270.31,1145 2650.49,1267.38 4270.31,1365 4275.81,1590.49 4285.81,1830.49 2854.51,1908.01 2734.51,1909.82 4305.81,2060.49 4268.43,2240 3432.72,2585 4435,3180
5V: 5V.1 C1.2 C2.2 C3.2 C4.2 C5.2 C6.1 D8.2 D9.2 I1.3 J1.A4/B9 J1.B4/A9 J4.20 J5.2 R3.1 R5.1 R18.2 U2.3 | length 5353
  Top Layer w10: R18.2 1970,1378.5 ; 5V.1 1970,1378.5 ; 2000,1695 2000,1820 2110.32,1930.32 R5.1 ; 2040,1575 2040,1442.01 1976.5,1378.5 1970,1378.5 ; R5.1@2338.19,1928.5 R3.1
  Top Layer w15: 1760.51,2130.51 J1.B4/A9 ; 1775,1795 1760,1810 1760,2268.98 1810.51,2319.49 J1.A4/B9 2001.94,2319.49 2332.19,2649.74 2332.19,2947.19 2505,3120 3943.71,3120 3952.5,3111.21 3952.5,2982.5 J4.20 3910,2615 v1(4030,2495)
  Bottom Layer 1 w15: v1(4030,2495) 4030,2330 v1(4070,2290)
BOOT: R20.2 U1.61 | length 956.8
  Top Layer w10: U1.61 3552.81,2468.09 3562.3,2468.09 v1(3564.21,2470)
  Bottom Layer 1 w10: v1(2799.21,2685) 2799.21,2615.86 2805.07,2610 2895,2610 3000,2505 3529.21,2505 v1(3564.21,2470)
CAN_H: J6.3 J7.3 R13.2 U2.7 | length 2744.7
  Top Layer w15: U2.7 4286.14,2340 4290.45,2335.69 4290.45,2333.29 4299.24,2324.5 4328.61,2324.5 4350.81,2324.5 4359.6,2333.29 4359.6,2354 4370.8,2365.2 R13.2 4419.2,2365.2 4430.4,2354 4430.4,2333.29 4439.19,2324.5 4952.37,2324.5 5497.22,1779.65 5676.78,1779.65 5741.56,1844.43 5741.56,1950.99 5711.11,1981.44 5698.68,1981.44 5689.89,1972.66 5689.89,1936.78 J6.3 5680.11,1936.78 5680.11,1972.66 5671.32,1981.44 5651.02,1981.44 5566,2066.47 5566,2192.87 5687.13,2314 5690,2314 5738.5,2362.5 5738.5,2427.16 5711.11,2454.56 5698.68,2454.56 5689.89,2445.77 5689.89,2409.89 J7.3
CAN_L: J6.2 J7.2 R13.1 U2.6 | length 2807.7
  Top Layer w15: U2.6 4286.14,2290 4290.45,2294.31 4290.45,2296.71 4299.24,2305.5 4320.74,2305.5 4350.81,2305.5 4359.6,2296.71 4359.6,2276 4370.8,2264.8 R13.1 4419.2,2264.8 4430.4,2276 4430.4,2296.71 4439.19,2305.5 4944.5,2305.5 5489.35,1760.65 5684.65,1760.65 5760.56,1836.57 5760.56,1958.86 5718.98,2000.44 5698.68,2000.44 5689.89,2009.23 5689.89,2045.11 J6.2 5680.11,2045.11 5680.11,2009.23 5671.32,2000.44 5658.89,2000.44 5585,2074.34 5585,2185 5695,2295 5697.87,2295 5757.5,2354.63 5757.5,2435.03 5718.98,2473.56 5698.68,2473.56 5689.89,2482.34 5689.89,2518.22 J7.2
CAN_RX_LED: R17.1 U1.36 | length 1383.5
  Top Layer w10: U1.36 3553.09,1951.64 3553.09,1931.91 v1(3555,1930) ; v1(3980,1910) 3980,1460 4170,1270 4251.65,1270 4304.69,1216.97 v1(4304.69,1215)
  Bottom Layer 1 w10: v1(3555,1930) 3960,1930 v1(3980,1910)
CAN_STB: U1.51 U2.8 | length 693.2
  Top Layer w10: U1.51 3803.11,2440 4200.71,2440 4250.71,2390 U2.8
CAN_TX_LED: R16.1 U1.35 | length 1333.7
  Top Layer w10: v1(3470,2015) 3471.91,2013.09 3471.91,2004.97 U1.35 ; v1(4030,1970) 4030,1625 4165,1490 4251.65,1490 4304.69,1436.97 v1(4304.69,1435)
  Bottom Layer 1 w10: v1(3470,2015) 3985,2015 v1(4030,1970)
FDCAN_RX: "FD RX.1" U1.45 U2.4 | length 1106.7
  Top Layer w10: U1.45 3705.27,2050 3965,2050 4071.57,2156.57 v1(4071.57,2240)
  Bottom Layer 1 w10: v1(4071.57,2240) 4412.12,2580.55 4412.12,2612.12 4420,2620
FDCAN_TX: "FD TX.1" U1.46 U2.1 | length 1125.3
  Top Layer w10: U1.46 3693.11,2090 3930,2090 3988.52,2148.52 3988.52,2324.67 4053.86,2390 v1(4070,2390)
  Bottom Layer 1 w10: v1(4070,2390) 4070,2460.54 4310,2700.54 4310,2760
GND: C1.1 C2.1 C3.1 C4.1 C5.1 C6.2 C7.2 C8.2 C9.2 C10.2 C11.2 C12.2 C13.2 C14.2 C15.2 D8.1 D9.1 GND.1 I1.1 J1.A1/B12 J1.B1/A12 J2.05 J2.07 J2.11 J3.20 J4.19 J6.1 J7.1 Q1.2 Q2.2 Q3.2 Q4.2 Q5.2 Q6.2 Q7.2 Q8.3 R1.2 R2.2 R19.1 R20.1 SW1.B1 SW1.B2 U1.15 U1.27 U1.31 U1.47 U1.63 U2.2 | length 505.5
  Top Layer w10: J1.B1/A12 1944.02,2099.02 v1(1945,2100) ; J1.A1/B12@1856.03,2350 1856.52,2350.49 1919.51,2350.49 v1(1920,2350) ; v1(3115,2320) 3116.91,2318.09 3130.96,2318.09 U1.15 ; U1.27 3294.93,2015.13 3339.8,2060 v1(3340,2060) ; U1.31 3393.09,2002.13 3393.09,2013.09 v1(3395,2015) ; U1.63 3519.05,2490 3519.05,2524.83 v1(3519.21,2525) ; U1.47 3695.95,2115 v1(3725,2115)
  other v1: 2539,1195.49 4122.6,1213.74 2140.49,1290.37 1690.49,1379 4132.6,1434.37 2470.49,1449 2741.04,1503.6 1920.8,1512.1 4132.6,1654.37 2885.57,1659.43 2840,1660 2535.49,1675.18 2765,1680 2465.49,1706.99 2290.49,1715.14 2375.49,1715.14 2185.49,1753.29 3455.71,1830 4147.6,1884.37 2331.91,2045.14 2751.91,2045.14 4157.6,2119.37 3856.5,2140 2060,2190 2060,2255 3007.72,2275 4070,2340 1980,2374.61 2448.5,2391.42 2761.5,2391.42 2865.49,2473.01 3495.71,2585 2799.21,2866.54 4235,3180.24 4335,3180.24 4385,3180.24
LED0: R11.1 U1.58 | length 1683.1
  Top Layer w10: v1(3525,2350) 3526.91,2351.91 3526.91,2358.67 U1.58
  Bottom Layer 1 w10: v1(3525,2350) 3435.86,2350 3430,2344.14 3430,1905 3535,1800 3995,1800 4315.49,2120.49 v1(4345.18,2120.49)
LED1: R12.1 U1.59 | length 1946
  Top Layer w10: U1.59 3578.49,2438.09 3592.3,2438.09 v1(3594.21,2440)
  Bottom Layer 1 w10: v1(3594.21,2440) 3524.21,2370 3365.86,2370 3360,2364.14 3360,1790 3405.86,1744.14 4084.14,1744.14 4225.49,1885.49 v1(4325.18,1885.49)
LED2: R8.1 U1.60 | length 1884.5
  Top Layer w10: v1(3485,2390) 3486.91,2391.91 3503.79,2391.91 3530.66,2418.79 U1.60
  Bottom Layer 1 w10: v1(3485,2390) 3320.86,2390 3315,2384.14 3315,1775 3390.87,1699.13 4266.54,1699.13 v1(4310.18,1655.49)
NetD1_1: D1.1 R3.2 | length 76.5
  Top Layer w10: R3.2 D1.1
NetD1_2: D1.2 Q1.3 | length 124.4
  Top Layer w10: Q1.3 D1.2@2419.37,2124.37
NetD2_1: D2.1 R4.2 | length 66.5
  Top Layer w10: R4.2 D2.1
NetD2_2: D2.2 Q2.3 | length 148
  Top Layer w10: Q2.3 2734.37,2105 D2.2
NetD3_1: LED2.1 R7.2 | length 216.9
  Top Layer w10: R7.2 4494.14,1590 4500,1584.14 LED2.1
NetD3_2: LED2.2 Q3.3 | length 272.7
  Top Layer w10: Q3.3 4170,1573.66 4188.66,1555 LED2.2
NetD4_1: LED0.1 R9.2 | length 186.9
  Top Layer w10: R9.2 4494.14,2060 4500,2054.14 LED0.1
NetD4_2: LED0.2 Q4.3 | length 244.5
  Top Layer w10: Q4.3 4210.63,2025 LED0.2
NetD5_1: LED1.1 R10.2 | length 209.9
  Top Layer w10: R10.2 4490.75,1830 4500,1820.75 LED1.1
NetD5_2: LED1.2 Q5.3 | length 255.6
  Top Layer w10: Q5.3 4185,1803.66 4198.66,1790 LED1.2
NetD6_1: CAN_TX.1 R14.2 | length 231.1
  Top Layer w10: R14.2 4475.75,1365 4500,1340.75 CAN_TX.1
NetD6_2: CAN_TX.2 Q6.3 | length 283.1
  Top Layer w10: Q6.3 4170,1353.66 4213.66,1310 CAN_TX.2
NetD7_1: CAN_RX.1 R15.2 | length 227
  Top Layer w10: R15.2 4485.75,1145 4500,1130.75 CAN_RX.1
NetD7_2: CAN_RX.2 Q7.3 | length 288.7
  Top Layer w10: Q7.3 4160,1133.03 4193.03,1100 CAN_RX.2
NetJ1_A5: J1.A5 R1.1 | length 135.5
  Top Layer w10: J1.A5 1905.79,2274.21 1925,2255 R1.1
NetJ1_B5: J1.B5 R2.1 | length 141.6
  Top Layer w10: J1.B5 1901.1,2156.1 1935,2190 R2.1
NetJ5_1: J5.1 Q8.2
NetQ1_1: Q1.1 R5.2 | length 108.9
  Top Layer w10: Q1.1 2333.54,1969.68 R5.2
NetQ2_1: Q2.1 R6.2 | length 119.7
  Top Layer w10: Q2.1 2735,1988.23 R6.2
NetQ3_1: Q3.1 R8.2 | length 63.2
  Top Layer w10: Q3.1 4207.72,1654.69 4270,1654.69 R8.2
NetQ4_1: Q4.1 R11.2 | length 73.2
  Top Layer w10: Q4.1 4232.72,2119.69 4305,2119.69 R11.2
NetQ5_1: Q5.1 R12.2 | length 63.2
  Top Layer w10: Q5.1 4222.72,1884.69 4285,1884.69 R12.2
NetQ6_1: Q6.1 R16.2 | length 58.2
  Top Layer w4: R16.2@4264.69,1434.37 R16.2
  Top Layer w10: Q6.1 R16.2@4264.69,1434.37
NetQ7_1: Q7.1 R17.2 | length 68.4
  Top Layer w10: Q7.1 4198.03,1214.37 4264.69,1214.37 R17.2
NetQ8_1: Q8.1 R18.1 R19.2 | length 168
  Top Layer w10: R19.2 R18.1 1816.5,1441.5 1840,1465 Q8.1
NRST: C15.1 J2.12 SW1.A1 SW1.A2 U1.7 | length 2220.7
  Top Layer w10: SW1.A1 SW1.A2 2833.9,2568.58 2865,2537.48 C15.1 ; v1(3215,2465) 3216.91,2463.09 3216.91,2454.84 U1.7
  Bottom Layer 1 w10: v1(2864.21,2536.5) 2935.71,2465 v1(3215,2465) 3240,2440 3545,2440 3555,2450 3575.93,2450 3820.93,2695 3975,2695 4235,2955 v1(4235,3020)
PA0: J4.3 U1.12 | length 802
  Top Layer w10: J4.3 3060,2990 3060,2472.56 U1.12
PA1: J4.2 U1.13 | length 710.1
  Top Layer w10: J4.2 3015,2935 3015,2489.73 U1.13
PA2: J4.1 U1.14 | length 851.4
  Top Layer w10: J4.1 2970,3000 2970,2506.89 U1.14
PA3: J3.1 U1.17 | length 746.7
  Top Layer w10: J3.1 3005,2003.79 U1.17
PA4: J3.2 U1.18 | length 838.5
  Top Layer w10: J3.2 3055,1420 3055,2025.95 U1.18
PA5: J3.3 U1.19 | length 688.9
  Top Layer w10: J3.3 3105,2048.11 U1.19
PA6: J3.4 U1.20 | length 786.6
  Top Layer w10: J3.4 3115,1370 3115,1386.77 3145,1416.77 3145,2060.27 U1.20
PA7: J3.5 U1.21 | length 660.2
  Top Layer w10: J3.5 3205,1484.07 3170,1519.07 3170,2056.02 3211.21,2097.23 U1.21
PA8: J3.16 U1.42 | length 781.2
  Top Layer w10: U1.42 3750,1921.76 3750,1415 J3.16
PA9: J3.17 U1.43 | length 693.5
  Top Layer w10: U1.43 3805,1894.6 J3.17
PA10: J3.18 U1.44 | length 843.1
  Top Layer w10: U1.44 3855,1872.44 3855,1420 J3.18
PB0: J3.6 U1.24 | length 735.7
  Top Layer w10: J3.6 3255,1420 3255,1715.21 3220,1750.21 3220,2023.92 U1.24
PB1: J3.7 U1.25 | length 611
  Top Layer w10: U1.25 3240,2016.08 3240,1790.21 3305,1725.21 J3.7
PB2: J3.8 U1.26 | length 719.4
  Top Layer w10: U1.26 3280.81,2028.14 3260,2007.33 3260,1835 3345,1750 3345,1410 J3.8
PB4: J4.14 U1.57 | length 582.4
  Top Layer w10: U1.57 3615,2418.92 3615,2935 J4.14
PB9: J4.13 U1.62 | length 637.5
  Top Layer w10: U1.62 3560.47,2503.58 3560.47,2990.47 J4.13
PB10: J3.9 U1.30 | length 557.8
  Top Layer w10: U1.30 3305,1941.89 3305,1855 3405,1755 J3.9
PB11: J3.10 U1.33 | length 629.1
  Top Layer w10: J3.10 3455,1420 3455,1640 3505,1690 3505,1916.21 U1.33
PB12: J3.11 U1.34 | length 515.7
  Top Layer w10: U1.34 3529,1920.05 3529,1508.07 3505,1484.07 J3.11
PB15: U1.37
PC2: J4.5 U1.10 | length 760.8
  Top Layer w10: J4.5 3200.05,3030.05 3200.05,3006.62 3160,2966.57 3160,2920 3140,2900 3140,2448.24 U1.10
PC3: J4.4 U1.11 | length 652.4
  Top Layer w10: J4.4 3110,2450.4 U1.11
PC4: J4.6 U1.22 | length 1664.1
  Top Layer w10: v1(3195,2005) 3195,2054.6 U1.22
  Bottom Layer 1 w10: v1(3195,2005) 2660,2540 2660,2710 2790,2840 3070,2840 3164,2934 3204,2934 J4.6
PC5: J4.7 U1.23 | length 1638.5
  Top Layer w10: U1.23 3239.05,2072.22 3265,2098.17 v1(3265,2125)
  Bottom Layer 1 w10: v1(3265,2125) 3005,2385 2925,2385 2740,2570 2740,2660 2845,2765 3115,2765 3250,2900 3250,2980 J4.7
PC6: J3.12 U1.38 | length 690.6
  Top Layer w10: J3.12 3555,1420 3555,1530 3580,1555 3580,1978.99 3545.27,2013.71 U1.38
PC7: J3.13 U1.39 | length 578
  Top Layer w10: U1.39 3605,1983.24 J3.13
PC8: J3.14 U1.40 | length 723.5
  Top Layer w10: U1.40 3650,1966.08 3650,1415 J3.14
PC9: J3.15 U1.41 | length 635.7
  Top Layer w10: U1.41 3705,1938.92 J3.15
PC10: J4.18 U1.52 | length 706
  Top Layer w10: U1.52 3815,2479.73 3815,2935 J4.18
PC11: J4.17 U1.53 | length 793.7
  Top Layer w10: U1.53 3770,2462.56 3770,3000 J4.17
PC12: J4.16 U1.54 | length 648.3
  Top Layer w10: U1.54 3715,2435.4 3715,2935 J4.16
PC13: J4.12 U1.2 | length 558.8
  Top Layer w10: U1.2 3350.4,2461.96 3335,2477.37 3335,2482.58 3334.46,2483.12 3334.46,2490.57 3335,2491.11 3335,2617.29 3510,2792.29 J4.12
PC14: J4.11 U1.3 | length 683
  Top Layer w10: U1.3 3336.48,2448.04 3315,2469.53 3315,2709.14 3450,2844.14 3450,2980 J4.11
PC15: J4.10 U1.4 | length 566.3
  Top Layer w10: U1.4 3322.56,2434.13 3295,2461.69 3295,2750 3410,2865 J4.10
PD2: J4.15 U1.55 | length 736
  Top Layer w10: U1.55 3670,2418.24 3670,3000 J4.15
PF0: J4.9 U1.5 | length 699.3
  Top Layer w10: U1.5 3265,2462.44 3265,2820 3360,2915 3360,2990 J4.9
PF1: J4.8 U1.6 | length 586.8
  Top Layer w10: U1.6 3240,2459.6 3240,2867.38 3310,2937.38 J4.8
STLINK_RX: J2.13 U1.8 | length 1595.4
  Top Layer w10: v1(3205,2535) 3205,2532.29 3195,2522.29 3195,2448.92 U1.8
  Bottom Layer 1 w10: v1(3205,2535) 3365,2695 3370,2695 3430,2755 3990,2755 4205,2970 4205,3087 4185,3107 v1(4185,3185)
STLINK_TX: J2.14 U1.9 | length 1422.1
  Top Layer w10: v1(3170,2535) 3170,2446.08 U1.9
  Bottom Layer 1 w10: v1(3170,2535) 3420,2785 3950,2785 v1(4185,3020)
SWCLK: J2.06 U1.50 | length 1041.6
  Top Layer w10: U1.50 3719.04,2328.09 3728.09,2328.09 v1(3730,2330)
  Bottom Layer 1 w10: v1(3730,2330) 4385,2985 v1(4385,3020)
SWDIO: J2.04 U1.49 | length 1077.6
  Top Layer w10: U1.49 3714.36,2295.57 3735.57,2295.57 v1(3755,2315)
  Bottom Layer 1 w10: v1(3755,2315) 4435,2995 v1(4435,3020)
SWO: J2.08 U1.56 | length 1022.4
  Top Layer w10: U1.56 3587.03,2364.53 3640,2417.49 v1(3640,2420)
  Bottom Layer 1 w10: v1(3640,2420) 3735,2420 v1(4335,3020)
pads on no net: J1.13 J1.14 J1.15 J1.16 J1.A6 J1.A7 J1.A8 J1.B6 J1.B7 J1.B8 J2.01 J2.02 J2.09 J2.10 J5.3 J6.4 J7.4

## Polygon pours and split planes (outlines as drawn)
3V3 on Top Layer "3V3_L01_P005" (solid, pour order 5): 3450,2615 3460,2605 3460,2525 3495,2490 3470,2460 3370,2460 3345,2485 3345,2550 3410,2615
NetJ5_1 on Top Layer "NETJ5_1_L01_P000" (solid, pour order 0): 1650,1790 1660,1800 1715,1800 1725,1790 1725,1670 1840,1555 1840,1490 1770,1490 1650,1610
5V on Top Layer "5V_L01_P002" (solid, pour order 2): 1837.5,1765 1850,1765 1905,1710 2065,1710 2135,1640 2570,1640 2585,1625 2585,1520 2560,1495 2075,1495 2075,1520 1995,1600 1890,1600 1765,1725 1765,1785 1785,1805 1797.5,1805
3V3 on 3V3 "NONET_L03_P003" (solid, shelved, pour order 3): 1315,3605 1360,3650 5940,3650 5940,700 5140,815 1185,815
GND on GND "NONET_L02_P004" (solid, shelved, pour order 4): 1250,3640 5395,3640 5890,3590 5955,840 1235,820 1215,840

## Silkscreen, mask and mechanical layers (free items; w line width, h text height)
Top Overlay:
  lines w10: 1609.06,1841 1609.06,1960 1944.06,1960 1944.06,1841 ; 2950,1010 2950,1315 ; 2950,1525 2950,1805 3955,1805 3960,1800 3960,1525 ; 2955,2885 2955,2580 3965,2580 3965,2885 ; 2955,3095 2955,3375 ; 3960,1010 3960,1315 ; 3965,3095 3965,3380 ; 5544.03,2720 5435,2720 5435,1851 5546.14,1851 ; 1510,1205 ccw(c1710,1205) 1710,1005 5585,1005 ccw(c5585,1205) 5785,1205 5785,3185 ccw(c5585,3185) 5585,3385 1710,3385 ccw(c1710,3185) 1510,3185 1510,1205
  text "FLASHING" at 4605,3140 h60
  text "PA2" at 3045,3120 h60 r90
  text "PA0" at 3145,3120 h60 r90
  text "PC2" at 3245,3120 h60 r90
  text "PC0" at 3345,3120 h60 r90
  text "PF0" at 3445,3120 h60 r90
  text "PC14" at 3545,3120 h60 r90
  text "PB9" at 3645,3120 h60 r90
  text "PD2" at 3745,3120 h60 r90
  text "PC11" at 3845,3120 h60 r90
  text "GND" at 3945,3120 h60 r90
  text "MROVER" at 1900,3105 h120
  text "DEV BOARD" at 1725,2925 h120
  text "2026 - CK" at 1725,2825 h60
  text "USB C" at 1735,2755 h60 r270
  text "5V" at 3940,2739.96 h60 r90
  text "PA1" at 3040,2699.98 h60 r90
  text "PC1" at 3240,2699.98 h60 r90
  text "PF1" at 3340,2699.98 h60 r90
  text "PC3" at 3140,2679.98 h60 r90
  text "PB4" at 3640,2679.98 h60 r90
  text "PC15" at 3440,2630 h60 r90
  text "PC13" at 3540,2630 h60 r90
  text "PC12" at 3740,2630 h60 r90
  text "PC10" at 3840,2630 h60 r90
  text "H L G" at 5515,2390 h60 r90
  text "CAN" at 5410,2250 h60 r90
  text "5V" at 2385,2195 h60
  text "3V3" at 2695,2175 h60
  text "H L G" at 5520,1920 h60 r90
  text "G 5V" at 1665,1875 h60
  text "5V" at 1990,1830 h60 r270
  text "PA3" at 3040,1550 h60 r90
  text "PA5" at 3140,1550 h60 r90
  text "PA7" at 3240,1550 h60 r90
  text "PB1" at 3340,1550 h60 r90
  text "PB10" at 3440,1550 h60 r90
  text "PB12" at 3540,1550 h60 r90
  text "PC7" at 3640,1550 h60 r90
  text "PC9" at 3740,1550 h60 r90
  text "PA9" at 3840,1550 h60 r90
  text "3V3" at 3940,1550 h60 r90
  text "PA4" at 3035,1124.96 h60 r90
  text "PA6" at 3135,1124.96 h60 r90
  text "PB0" at 3235,1124.96 h60 r90
  text "PB2" at 3335,1124.96 h60 r90
  text "PC6" at 3535,1124.96 h60 r90
  text "PC8" at 3635,1124.96 h60 r90
  text "PA8" at 3735,1124.96 h60 r90
  text "GND" at 3935,1124.96 h60 r90
  text "PC11" at 3435,1094.97 h60 r90
  text "PA10" at 3835,1074.98 h60 r90

## Text inside footprints (layer, text, board x,y; h text height)
J1: Top Overlay "*" at 1830.05,2463.48 h50 r270; Top 3D Body "*" at 1830.05,2463.48 h50 r270